# Altium PCB PLL.PcbDoc
Units mm, origin at the board's own origin, x right, y up, seen from the top; angles counter-clockwise.
Board outline 19 x 18 mm, 4 copper layers (Top Layer, Layer 1, Layer 2, Bottom Layer), stack 1.641 mm thick; 38 components, 24 nets, 110 pads, 51 vias.
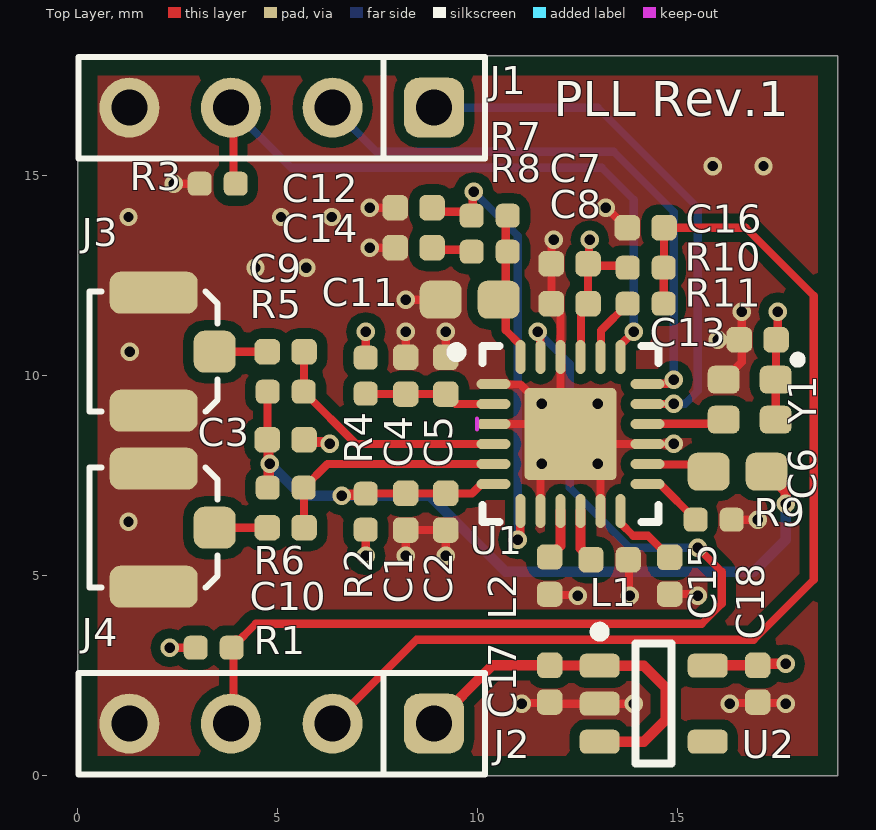
[diagram p0: Top Layer view]
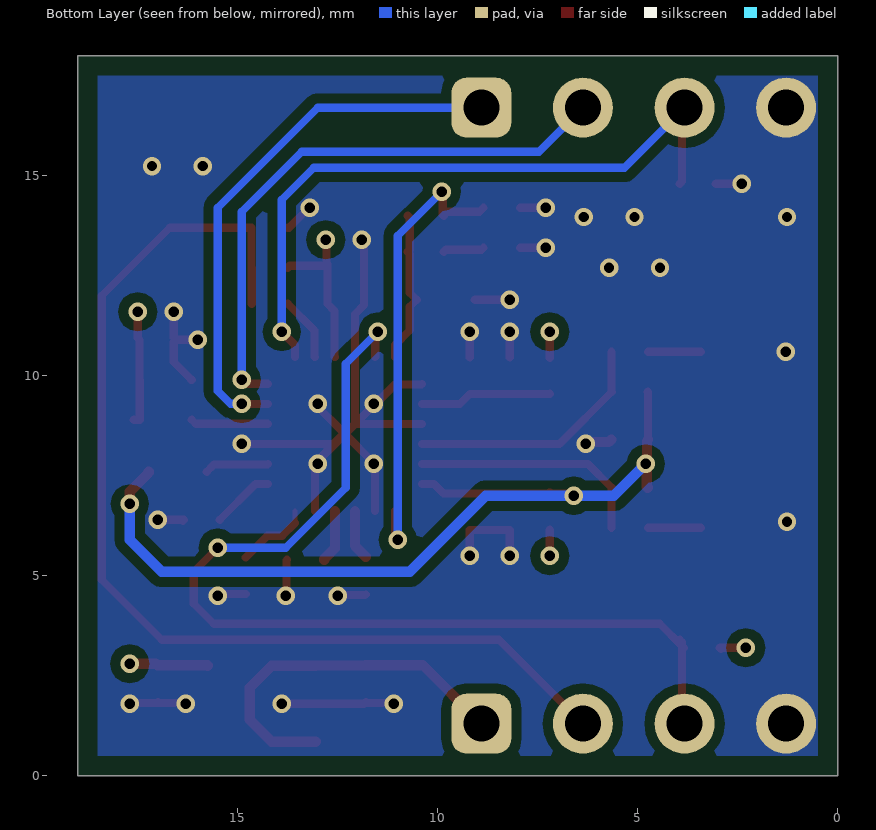
[diagram p1: Bottom Layer view, seen from below]
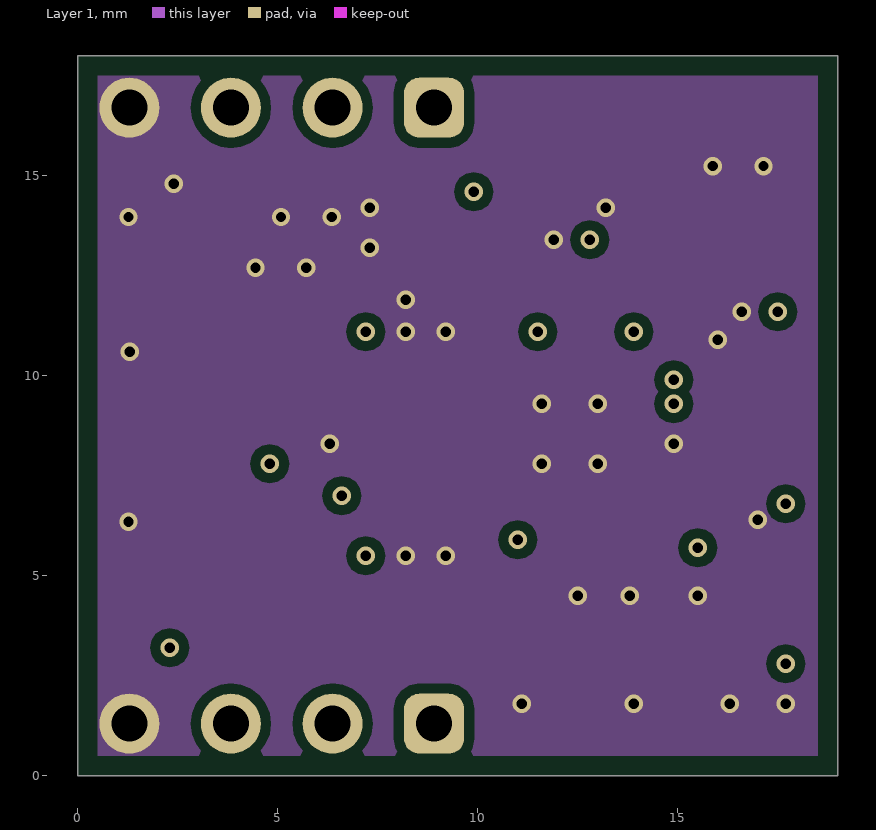
[diagram p2: Layer 1]
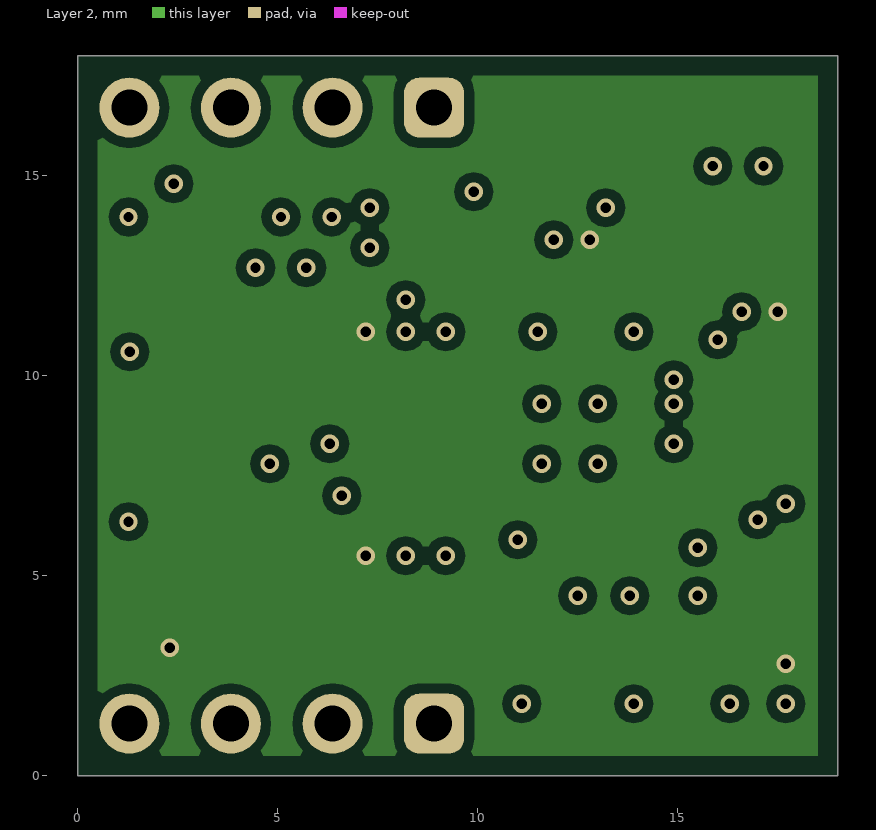
[diagram p3: Layer 2]
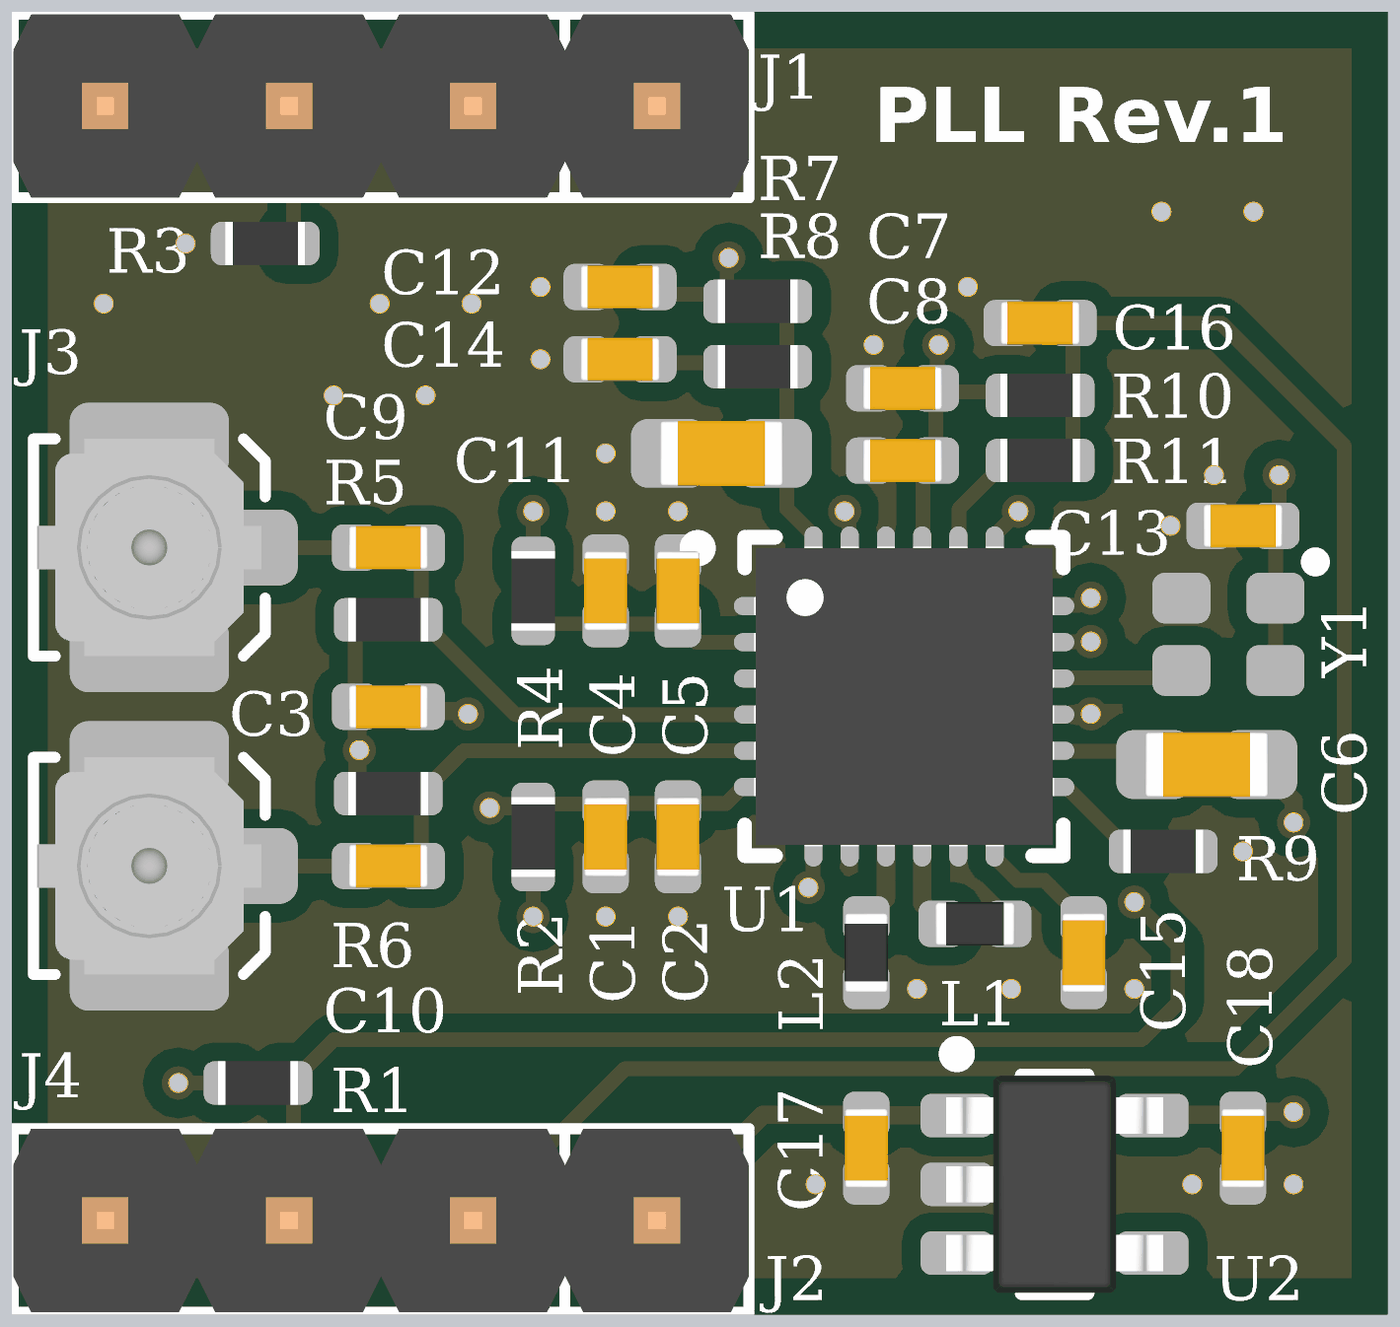
[diagram p4: 3D render of the assembled board from above, using the file's embedded part models]

## Layer stack, top to bottom
Top Solder: solder mask 0.025, Solder Resist, Dk 3.5
Top Layer: signal copper 0.0356
Dielectric 2: prepreg 0.1702, PP-006, Dk 3.69
Layer 1: signal copper 0.0178
Dielectric 1: dielectric 1.1938, FR-4, Dk 3.69
Layer 2: signal copper 0.0178
Dielectric 3: prepreg 0.1702, PP-006, Dk 3.69
Bottom Layer: signal copper 0.0356
Bottom Solder: solder mask 0.025, Solder Resist, Dk 3.5

## Board outline
0,0 0,18 19,18 19,0

## Design rules (kind name [scope] priority, off if disabled: settings)
BoardOutlineClearance [All] p1: gap=0.381 ignorepadtopadclearanceinfootprint=FALSE
Clearance "Clearance Polygons" [InPolygon] p1: gap=0.254 ignorepadtopadclearanceinfootprint=FALSE except(0: Arc-Hole Track-Hole SMDPad-Hole THPad-Hole Via-Hole Fill-Hole Poly-Hole Region-Hole Text-Hole)
Clearance [All] p2: gap=0.127 ignorepadtopadclearanceinfootprint=FALSE except(0: Arc-Hole Track-Hole SMDPad-Hole THPad-Hole Via-Hole Fill-Hole Poly-Hole Region-Hole Text-Hole)
ComponentClearance "HM-TRP & UFL" [InComponent('X1') vs InComponent('U1')] p1: gap=0 collisioncheckmode=3 verticalgap=0 showdistances=FALSE
ComponentClearance [All] p2: gap=0.025 collisioncheckmode=3 verticalgap=0.025 showdistances=FALSE
DiffPairsRouting [All] p1: maxlimit=10 minlimit=0.127 mostfreqgap=0.203 toplayer_minwidth=0.127 toplayer_maxwidth=0.381 toplayer_prefwidth=0.203 midlayer1_minwidth=0.127 midlayer1_maxwidth=0.381 midlayer1_prefwidth=0.203 midlayer2_minwidth=0.127 midlayer2_maxwidth=0.381 midlayer2_prefwidth=0.203 bottomlayer_minwidth=0.127 bottomlayer_maxwidth=0.381 bottomlayer_prefwidth=0.203 maxuncoupledlength=12.7
HoleSize [All] p1: absolutevalues=TRUE maxlimit=6.731 minlimit=0.254 maxpercent=80.000 minpercent=20.000
HoleToHoleClearance [All] p1: gap=0.254 allowstackedmicrovias=FALSE
MinimumAnnularRing [All] p1: minimumring=0.102
MinimumSolderMaskSliver [All] p1: minsoldermaskwidth=0
PlaneClearance [All] p1: clearance=0.254
PlaneConnect [All] p1: planeconnectstyle=Direct reliefexpansion=0.102 reliefentries=4 reliefconductorwidth=0.152 reliefairgap=0.152
PolygonConnect "Via connect style" [isVia] p1: connectstyle=Direct reliefconductorwidth=0.254 reliefentries=4 polygonreliefangle="90 Angle" airgapwidth=0.254
PolygonConnect [All] p2: connectstyle=Direct reliefconductorwidth=0.254 reliefentries=4 polygonreliefangle="90 Angle" airgapwidth=0.152
RoutingCorners [All] p1: cornerstyle=45-Degree minsetback=1.25 maxsetback=1.25
RoutingVias [All] p1: holewidth=0.305 width=0.559 viastyle="Through Hole" minholewidth=0.254 minwidth=0.457 maxholewidth=2.54 maxwidth=2.896
SilkToSilkClearance [All] p1: silktosilkclearance=0
SilkToSolderMaskClearance [IsPad] p1: minsilkscreentomaskgap=0.127 clearancetoexposedcopper=TRUE
SolderMaskExpansion [All] p1: expansion=0
Width [All] p1: maxlimit=10.16 minlimit=0.127 preferedwidth=0.203
20 further rules are at their usual default settings.

## Components (designator, comment, footprint, x,y, rotation, side; value= is the part's Value field where it differs from the comment)
C1 "CAP 100nF 16V X7R 0402" GEN_C_0402 8.2,6.6 r90 top value=100nF
C2 "10pF" GEN_C_0402 9.2,6.6 r90 top
C3 "CAP 100nF 16V X7R 0402" GEN_C_0402 5.2,8.4 r180 top value=100nF
C4 "CAP 100nF 16V X7R 0402" GEN_C_0402 8.2,10 r270 top value=100nF
C5 "10pF" GEN_C_0402 9.2,10 r270 top
C6 "CAP 10uF 10V X5R 0603" GEN_C_0603 16.5,7.6 r0 top value=10uF
C7 "CAP 100nF 16V X7R 0402" GEN_C_0402 12.3,12.8 r0 top value=100nF
C8 "10pF" GEN_C_0402 12.3,11.8 r0 top
C9 "CAP 1nF 50V X7R 0402" GEN_C_0402 5.2,10.6 r0 top value=1nF
C10 "CAP 1nF 50V X7R 0402" GEN_C_0402 5.2,6.2 r0 top value=1nF
C11 "1.2nF" GEN_C_0603 9.8,11.9 r0 top
C12 "470pF" GEN_C_0402 8.4,14.2 r0 top
C13 "CAP 100nF 16V X7R 0402" GEN_C_0402 17,10.9 r180 top value=100nF
C14 "CAP 22nF 25V X7R 0402" GEN_C_0402 8.4,13.2 r0 top value=22nF
C15 "CAP 10nF 50V X7R 0402" GEN_C_0402 14.8,5 r90 top value=10nF
C16 "CAP 10nF 50V X7R 0402" GEN_C_0402 14.2,13.7 r0 top value=10nF
C17 "CAP 1uF 25V X5R 0402" GEN_C_0402 11.8,2.3 r90 top value=1uF
C18 "CAP 1uF 25V X5R 0402" GEN_C_0402 17,2.3 r90 top value=1uF
J1 "61300411121" GEN_2.54mm_4_Pin_TH 5.1,16.7 r180 top
J2 "61300411121" GEN_2.54mm_4_Pin_TH 5.1,1.3 r180 top
J3 "UFL" AMP_A-1JB 1.9,10.6 r0 top
J4 "UFL" AMP_A-1JB 1.9,6.2 r0 top
L1 "3nH" GEN_L_0402 13.3,5.4 r180 top
L2 "3nH" GEN_L_0402 11.8,5 r90 top
R1 "RES 10K OHM 1% 1/10W 0402" GEN_R_0402 3.4,3.2 r0 top value=10K
R2 "0" GEN_R_0402 7.2,6.6 r90 top
R3 "RES 10K OHM 1% 1/10W 0402" GEN_R_0402 3.5,14.8 r180 top value=10K
R4 "0" GEN_R_0402 7.2,10 r270 top
R5 "49.9" GEN_R_0402 5.2,9.6 r180 top
R6 "49.9" GEN_R_0402 5.2,7.2 r180 top
R7 "1.5K" GEN_R_0402 10.3,14 r180 top
R8 "560" GEN_R_0402 10.3,13.1 r0 top
R9 "RES 4.7K OHM 1% 1/10W 0402" GEN_R_0402 15.9,6.4 r180 top value=4.7K
R10 "RES 10K OHM 1% 1/10W 0402" GEN_R_0402 14.2,12.7 r0 top value=10K
R11 "RES 1K OHM 1% 1/10W 0402" GEN_R_0402 14.2,11.8 r0 top value=1K
U1 "ADF4360-7" AD_QFN24_CP-24-14 12.321,8.541 r0 top
U2 "LP5907MFX-3.3" GEN_SOT23_5_950_2900X1600X1450 14.4,1.8 r0 top
Y1 "16MHz" ECS_TXO-2016 16.8,9.4 r180 top

## Footprints (in the part's own frame and the unit in brackets; to place one, negate y for a bottom-side part, rotate by r counter-clockwise, add the part's x,y. Pads: shape width x height; smd on the part's side, far side on the other; paste and mask are expansions set on the pad)
AD_QFN24_CP-24-14 [mm] "QFN, 24-Leads, Body 4.00x4.00mm, Pitch 0.50mm, Thermal Pad 2.30x2.30mm, IPC Medium Density"
  oval 0.85x0.25 smd: 1(-1.925,1.25) 2(-1.925,0.75) 3(-1.925,0.25) 4(-1.925,-0.25) 5(-1.925,-0.75) 6(-1.925,-1.25) 13(1.925,-1.25) 14(1.925,-0.75) 15(1.925,-0.25) 16(1.925,0.25) 17(1.925,0.75) 18(1.925,1.25)
  oval 0.25x0.85 smd: 7(-1.25,-1.925) 8(-0.75,-1.925) 9(-0.25,-1.925) 10(0.25,-1.925) 11(0.75,-1.925) 12(1.25,-1.925) 19(1.25,1.925) 20(0.75,1.925) 21(0.25,1.925) 22(-0.25,1.925) 23(-0.75,1.925) 24(-1.25,1.925)
  rrect10% 2.3x2.3 smd paste-2.3: 25(0,0)
  silkscreen extent -2.97,-2.2 2.2,2.2, body extent -2.07,-2.07 2.07,2.07, height 0.8
AMP_A-1JB [mm]
  rrect50% 1.05x1.05 smd: 1(1.525,0)
  rrect50% 2.2x1.05 smd: 2(0,-1.475) 2(0,1.475)
  silkscreen extent -1.6,-1.5 1.6,1.5, body extent -1.55,-1.5 1.55,1.5, height 1.25
ECS_TXO-2016 [mm]
  rrect50% 0.8x0.7 smd: 1(-0.65,-0.5) 2(0.65,-0.5) 3(0.65,0.5) 4(-0.65,0.5)
  silkscreen extent -1.3,-1.1 -1.1,-0.9, body extent -1.05,-0.85 1.05,0.85, height 0.8
GEN_2.54mm_4_Pin_TH [mm]
  rrect50% 1.5x1.5 hole 0.9: 1(-3.81,0)
  round 1.5 hole 0.9: 2(-1.27,0) 3(1.27,0) 4(3.81,0)
  silkscreen extent -5.08,-1.27 5.08,1.27, body extent -5.08,-1.27 5.08,1.27, height 8.54
GEN_C_0402 [mm] "Chip Capacitor, 0402, IPC Medium Density"
  rrect50% 0.64x0.64 smd: 1(-0.46,0) 2(0.46,0)
  body extent -0.55,-0.3 0.55,0.3, height 0.6
GEN_C_0603 [mm] "Chip Capacitor, 2-Leads, Body 1.60x0.80mm, IPC Medium Density"
  rrect50% 1.05x0.95 smd: 1(-0.725,0) 2(0.725,0)
  body extent -0.85,-0.45 0.85,0.45, height 0.9
GEN_L_0402 [mm] "Chip Inductor, 2-Leads, Body 1.00x0.50mm, IPC Medium Density"
  rrect50% 0.63x0.64 smd: 1(-0.465,0) 2(0.465,0)
  body extent -0.55,-0.3 0.55,0.3, height 0.45
GEN_R_0402 [mm] "Chip Resistor, 2-Leads, Body 1.00x0.50mm, IPC Medium Density"
  rrect50% 0.6x0.6 smd: 1(-0.45,0) 2(0.45,0)
  body extent -0.55,-0.3 0.55,0.3, height 0.4
GEN_SOT23_5_950_2900X1600X1450 [mm] "SOT23, 5-Leads, Body 2.90x2.80mm, Pitch 0.95mm, IPC Medium Density"
  rrect50% 1x0.6 smd: 1(-1.35,0.95) 2(-1.35,0) 3(-1.35,-0.95) 4(1.35,-0.95) 5(1.35,0.95)
  silkscreen extent -1.47,-1.5 0.45,1.92, body extent -1.5,-1.5 1.5,1.5, height 1.45

## Part data
C1 C3 C4 C7 C13: Package=0402, Supplier Part Number 1=490-4759-1-ND, Voltage Rating=16V, Supplier 1=Digi-Key
C2 C5 C8: library part "CAP 10pF 50V C0G 0402", Package=0402, Supplier Part Number 1=1276-1139-1-ND, Temperature Coefficient=C0G, Voltage Rating=50V, Supplier 1=Digi-Key
C6: Package=0402, Supplier Part Number 1=490-10474-1-ND, Voltage Rating=10V, Supplier 1=Digi-Key
C9 C10: Package=0402, Supplier Part Number 1=490-4761-1-ND, Voltage Rating=50V, Supplier 1=Digi-Key
C11: library part "CAP 1.2nF 50V C0G 0603", Package=0603, Supplier Part Number 1=490-1453-1-ND, Temperature Coefficient=C0G, Voltage Rating=50V, Supplier 1=Digi-Key
C12: library part "CAP 470pF 50V C0G 0402", Package=0402, Supplier Part Number 1=490-1297-1-ND, Temperature Coefficient=C0G, Voltage Rating=50V, Supplier 1=Digi-Key
C14: Package=0402, Supplier Part Number 1=490-10699-1-ND, Voltage Rating=25V, Supplier 1=Digi-Key
C15 C16: Package=0402, Supplier Part Number 1=490-4762-1-ND, Voltage Rating=50V, Supplier 1=Digi-Key
C17 C18: Package=0402, Supplier Part Number 1=490-10017-1-ND, Voltage Rating=25V, Supplier 1=Digi-Key
J1 J2: library part "CONN 2.54mm 4 Pin TH", Supplier Part Number 1=732-5317-ND, Supplier 1=Digi-Key
J3 J4: library part "UFL Jack SMD", Supplier Part Number 1=ARF1579CT-ND, Supplier 1=Digi-Key
L1 L2: library part "IND 3nH +/-0.05nH 0402", Supplier Part Number 1=490-8434-1-ND, Supplier 1=Digi-Key
R1 R3 R10: Package=0402, Power Rating=0.1W, Supplier Part Number 1=P10.0KLCT-ND, Tolerance=1%, Supplier 1=Digi-Key
R2 R4: library part "RES 0 OHM 1/16W 0402", Package=0402, Power Rating=0.0625W, Supplier Part Number 1=311-0.0JRCT-ND, Supplier 1=Digi-Key
R5 R6: library part "RES 49.9 OHM 1% 1/10W 0402", Package=0402, Power Rating=0.1W, Supplier Part Number 1=P49.9LCT-ND, Tolerance=1%, Supplier 1=Digi-Key
R7: library part "RES 1.5K OHM 1% 1/16W 0402", Package=0402, Power Rating=0.0625W, Supplier Part Number 1=311-1.50KLRCT-ND, Tolerance=1%, Supplier 1=Digi-Key
R8: library part "RES 560 OHM 1% 1/16W 0402", Package=0402, Power Rating=0.0625W, Supplier Part Number 1=311-560LRCT-ND, Tolerance=1%, Supplier 1=Digi-Key
R9: Package=0402, Power Rating=0.1W, Supplier Part Number 1=P4.70KLCT-ND, Tolerance=1%, Supplier 1=Digi-Key
R11: Package=0402, Power Rating=0.1W, Supplier Part Number 1=P1.00KLCT-ND, Tolerance=1%, Supplier 1=Digi-Key
U1: library part "IC PLL ADF4360-7", Supplier Part Number 1=ADF4360-7BCPZRL7CT-ND, Supplier 1=Digi-Key
U2: library part "IC LDO LP5907MFX-3.3", Supplier Part Number 1=296-38557-1-ND, Supplier 1=Digi-Key
Y1: library part "OSC 16MHz ECS-TXO-2016", Supplier Part Number 1=XC3161CT-ND, Supplier 1=Digi-Key

## Via types
v1: diameter 0.457, hole 0.254, Top Layer to Bottom Layer, tented both sides, 51 vias

## Nets (pads, with @x,y where several pads share a name; then routed paths per layer and width w, separated by ;. In a path a pad name is that pad's centre, name@x,y a point inside that pad or via, vN(x,y) a via of type N, cw(c..) or ccw(c..) an arc to the next point about the centre after c; other vN are vias at no path point)
+3V3: C7.2 C8.2 C13.1 C18.2 R1.1 R2.1 R4.1 R10.1 U1.21 U2.5 Y1.1 Y1.4 | length 10.9
  Top Layer w0.203: v1(2.3,3.2) R1.1 R1.1@2.925,3.175 ; v1(7.2,5.5) R2.1 ; R4.1 v1(7.2,11.1) ; U1.21 12.58,10.475 12.58,11.62 C8.2 C7.2 ; v1(12.8,13.4) 12.78,13.38 12.78,12.82 C7.2 ; R10.1 13.7,12.75 12.81,12.75 C7.2 ; v1(17.5,11.6) 17.5,10.94 C13.1 17.455,10.895 17.455,9.905 Y1.1 Y1.4 Y1.4@17.6,8.9
  Top Layer w0.254: U2.5 15.76,2.76 C18.2 17.02,2.78 17.04,2.8 v1(17.7,2.8)
+5V: C17.2 J2.1 U2.1 U2.3 | length 9.3
  Top Layer w0.254: J2.1 10.37,2.76 C17.2 11.805,2.755 13.045,2.755 U2.1 14.15,2.75 14.7,2.2 14.7,1.4 14.15,0.85 U2.3
CE: J2.3 R1.2 U1.23 | length 25.2
  Top Layer w0.203: J2.3 3.89,1.36 R1.2@3.89,3.24 ; R1.2 R1.2@3.89,3.24 ; R1.2@3.95,3.4 3.89,3.34 R1.2@3.89,3.24 ; v1(11.5,11.1) 11.5,11.031 11.562,10.969 11.562,10.475 U1.23 ; v1(15.5,5.7) 16.1,5.1 16.1,4.3 15.6,3.8 4.45,3.8 R1.2@3.89,3.24
  Bottom Layer w0.203: v1(11.5,11.1) 12.3,10.3 12.3,7.2 13.8,5.7 v1(15.5,5.7)
CLK: J1.1 U1.17 | length 13.6
  Top Layer w0.203: U1.17 14.25,9.295 14.895,9.295 v1(14.9,9.3)
  Bottom Layer w0.203: J1.1 13,16.7 15.5,14.2 15.5,9.619 15.181,9.3 v1(14.9,9.3)
DATA: J1.2 U1.18 | length 14.5
  Top Layer w0.203: U1.18 14.255,9.8 14.731,9.8 14.831,9.9 v1(14.9,9.9)
  Bottom Layer w0.203: J1.2 7.47,15.6 13.4,15.6 14.9,14.1 v1(14.9,9.9)
GND: C1.1 C2.1 C3.1 C4.1 C5.1 C7.1 C8.1 C11.1 C12.1 C13.2 C14.1 C15.1 C16.1 C17.1 C18.1 J1.4 J2.4 J3.2 J4.2 L1.1 L2.1 R3.2 R9.1 U1.1 U1.3 U1.8 U1.11 U1.15 U1.22 U1.25 U2.2 Y1.2 | length 36.5
  Top Layer w0.203: v1(2.4,14.8) R3.2 ; v1(7.3,13.2) C14.1 ; v1(7.3,14.2) C12.1 ; v1(8.2,5.5) C1.1 C2.1 v1(9.2,5.5) ; C4.1 v1(8.2,11.1) ; v1(8.2,11.9) C11.1 ; C5.1 v1(9.2,11.1) ; U1.3@10.392,8.795 U1.3 U1.25@12.064,8.791 ; U1.1 10.405,9.782 11.073,9.782 U1.25@12.064,8.791 ; v1(11.1,1.8) 11.12,1.82 11.78,1.82 C17.1 11.84,1.8 U2.2 v1(13.9,1.8) ; U1.8 11.571,7.791 U1.25@11.6,7.82 ; v1(11.6,7.8) U1.25@11.6,7.82 ; v1(11.6,9.3) 11.6,9.262 U1.25@12.071,8.791 ; L2.1 11.818,4.517 12.482,4.517 v1(12.5,4.5) ; v1(11.9,13.4) 11.84,13.34 C7.1 C8.1 11.84,11.768 12.071,11.537 U1.22 U1.25@12.071,8.791 ; v1(13,7.8) 13,7.9 U1.25@12.609,8.291 ; v1(13,9.3) 13.08,9.3 U1.25 ; U1.11 13.071,7.791 U1.25@12.571,8.291 ; v1(13.2,14.2) 13.22,14.2 13.72,13.7 C16.1 ; L1.1 13.782,5.382 13.782,4.518 v1(13.8,4.5) ; C15.1 15.46,4.54 v1(15.5,4.5) ; v1(14.9,8.3) 14.891,8.291 U1.15 U1.25@12.609,8.291 ; v1(16,10.9) C13.2 ; Y1.2 16.16,9.9 16.6,10.34 16.6,10.84 C13.2 ; v1(16.3,1.8) 16.32,1.82 16.98,1.82 C18.1 17.02,1.82 17.68,1.82 v1(17.7,1.8) ; R9.1 16.375,6.375 16.375,6.4 v1(17,6.4) ; v1(16.6,11.6) 16.6,10.96 C13.2 ; U1.25@11.6,7.82 U1.25 ; U1.25@12.064,8.791 U1.25@12.071,8.791 ; U1.25@12.064,8.791 12.314,8.541 U1.25 ; U1.25@12.071,8.791 U1.25 ; U1.25 U1.25@12.571,8.291 ; U1.25 12.359,8.541 U1.25@12.609,8.291 ; U1.25@12.571,8.291 U1.25@12.609,8.291
  Top Layer w0.254: C3.1 5.721,8.339 6.261,8.339 v1(6.3,8.3)
  other v1: 1.27,6.35 1.3,10.6 4.445,12.7 5.715,12.7 1.27,13.97 5.08,13.97 6.35,13.97 15.875,15.24 17.145,15.24
LE: J1.3 R3.1 U1.19 | length 17
  Top Layer w0.203: J1.3 3.89,16.64 3.89,14.86 R3.1 ; U1.19 13.571,10.769 13.9,11.098 v1(13.9,11.1)
  Bottom Layer w0.203: J1.3 5.33,15.2 13.1,15.2 13.9,14.4 v1(13.9,11.1)
LOCKED: C16.2 J2.2 R10.2 R11.2 | length 27
  Top Layer w0.203: J2.2 8.47,3.4 16.9,3.4 18.4,4.9 18.4,12 16.7,13.7 C16.2 14.655,13.695 14.655,12.705 R10.2 R11.2
NetC1_2: C1.2 C2.2 C3.2 C6.2 R2.2 R5.2 R6.2 U1.6 | length 22.6
  Top Layer w0.203: C3.2 4.745,8.405 4.745,9.595 R5.2 ; R2.2 7.205,7.055 8.195,7.055 C1.2 C2.2 9.86,7.06 10.091,7.291 U1.6
  Top Layer w0.254: C3.2 4.77,8.37 4.77,7.83 v1(4.8,7.8) 4.775,7.775 4.775,7.225 R6.2 ; v1(6.6,7) 6.625,7.025 7.175,7.025 R2.2 ; C6.2 17.225,7.576 17.7,7.101 v1(17.7,6.8)
  Bottom Layer w0.254: v1(4.8,7.8) 5.6,7 v1(6.6,7) 8.8,7 10.7,5.1 16.9,5.1 17.7,5.9 v1(17.7,6.8)
NetC4_2: C4.2 C5.2 R4.2 U1.2 | length 3.3
  Top Layer w0.203: R4.2 7.205,9.545 8.195,9.545 C4.2 C5.2 9.449,9.291 U1.2
NetC6_1: C6.1 U1.14 | length 1.6
  Top Layer w0.203: U1.14 14.255,7.782 15.593,7.782 C6.1
NetC9_1: C9.1 J3.1 | length 1.3
  Top Layer w0.203: J3.1 C9.1
NetC9_2: C9.2 R5.1 U1.4 | length 6.3
  Top Layer w0.203: C9.2 5.655,10.595 5.655,9.605 R5.1 6.959,8.291 U1.4
NetC10_1: C10.1 J4.1 | length 1.3
  Top Layer w0.203: J4.1 C10.1
NetC10_2: C10.2 R6.1 U1.5 | length 6
  Top Layer w0.203: C10.2 5.655,6.205 5.655,7.195 R6.1 6.241,7.791 U1.5
NetC11_2: C11.2 R7.1 R8.2 U1.24 | length 3.9
  Top Layer w0.203: R7.1 10.7,13.95 10.7,13.15 R8.2 10.7,13.05 10.7,12.075 C11.2 10.7,11.725 10.7,11.137 11.071,10.766 U1.24
NetC14_2: C14.2 R8.1 | length 1
  Top Layer w0.203: C14.2 8.91,13.15 9.8,13.15 R8.1
NetC15_2: C15.2 U1.12 | length 1.9
  Top Layer w0.127: U1.12@13.571,6.316 U1.12
  Top Layer w0.203: U1.12@13.571,6.316 13.887,6 14.1,6 14.26,6 C15.2
NetL1_2: L1.2 U1.10 | length 1.3
  Top Layer w0.254: U1.10 12.571,5.686 12.835,5.422 L1.2
NetL2_2: L2.2 U1.9 | length 1.3
  Top Layer w0.254: L2.2 11.8,5.477 12.071,5.748 U1.9
NetR9_2: R9.2 U1.13 | length 1.6
  Top Layer w0.203: U1.13 14.559,7.291 R9.2
NetR11_1: R11.1 U1.20 | length 1.6
  Top Layer w0.203: U1.20 13.08,10.475 13.08,11.13 R11.1
NetU1_16: U1.16 Y1.3 | length 1.9
  Top Layer w0.203: U1.16 14.255,8.8 16.05,8.8 Y1.3
VTUNE: C12.2 R7.2 U1.7 | length 11.6
  Top Layer w0.203: C12.2 8.96,14.1 9.75,14.1 R7.2 9.875,14.025 9.875,14.575 v1(9.9,14.6) ; v1(11,5.9) 11,5.969 11.062,6.031 11.062,6.607 U1.7
  Bottom Layer w0.203: v1(9.9,14.6) 11,13.5 v1(11,5.9)
pads on no net: U2.4

## Polygon pours and split planes (outlines as drawn)
GND on Layer 1 "Layer 1-GND" (solid, pour order 0): 0.5,17.5 18.5,17.5 18.5,0.5 0.5,0.5
+3V3 on Layer 2 "Layer 2-+3V3" (solid, pour order 6): 0.5,17.5 18.5,17.5 18.5,0.5 0.5,0.5
+3V3 on Layer 2 "Layer 2-+3V3 1" (solid, pour order 2): 0,18
GND on Bottom Layer "Bottom Layer-GND" (solid, remove dead copper, pour order 8): 0.5,17.5 18.5,17.5 18.5,0.5 0.5,0.5
GND on Top Layer "Top Layer-GND" (solid, remove dead copper, pour order 10): 0.5,17.5 18.5,17.5 18.5,0.5 0.5,0.5

## Keep-outs
Top Layer:
  lines w0.1: 9.976,8.654 9.976,8.928

## Silkscreen, mask and mechanical layers (free items; w line width, h text height)
Top Overlay:
  text "PLL Rev.1" at 11.9,16.2 h1.5
Mechanical 1:
  the board outline again, w0.1